# Altium PCB single Joystick and motor PCB.PcbDoc
Units mm, origin at the board's own origin, x right, y up, seen from the top; angles counter-clockwise.
Board outline 152.4 x 101.6 mm, 2 copper layers (Top Layer, Bottom Layer); 15 components, 31 nets, 69 pads, 4 vias.
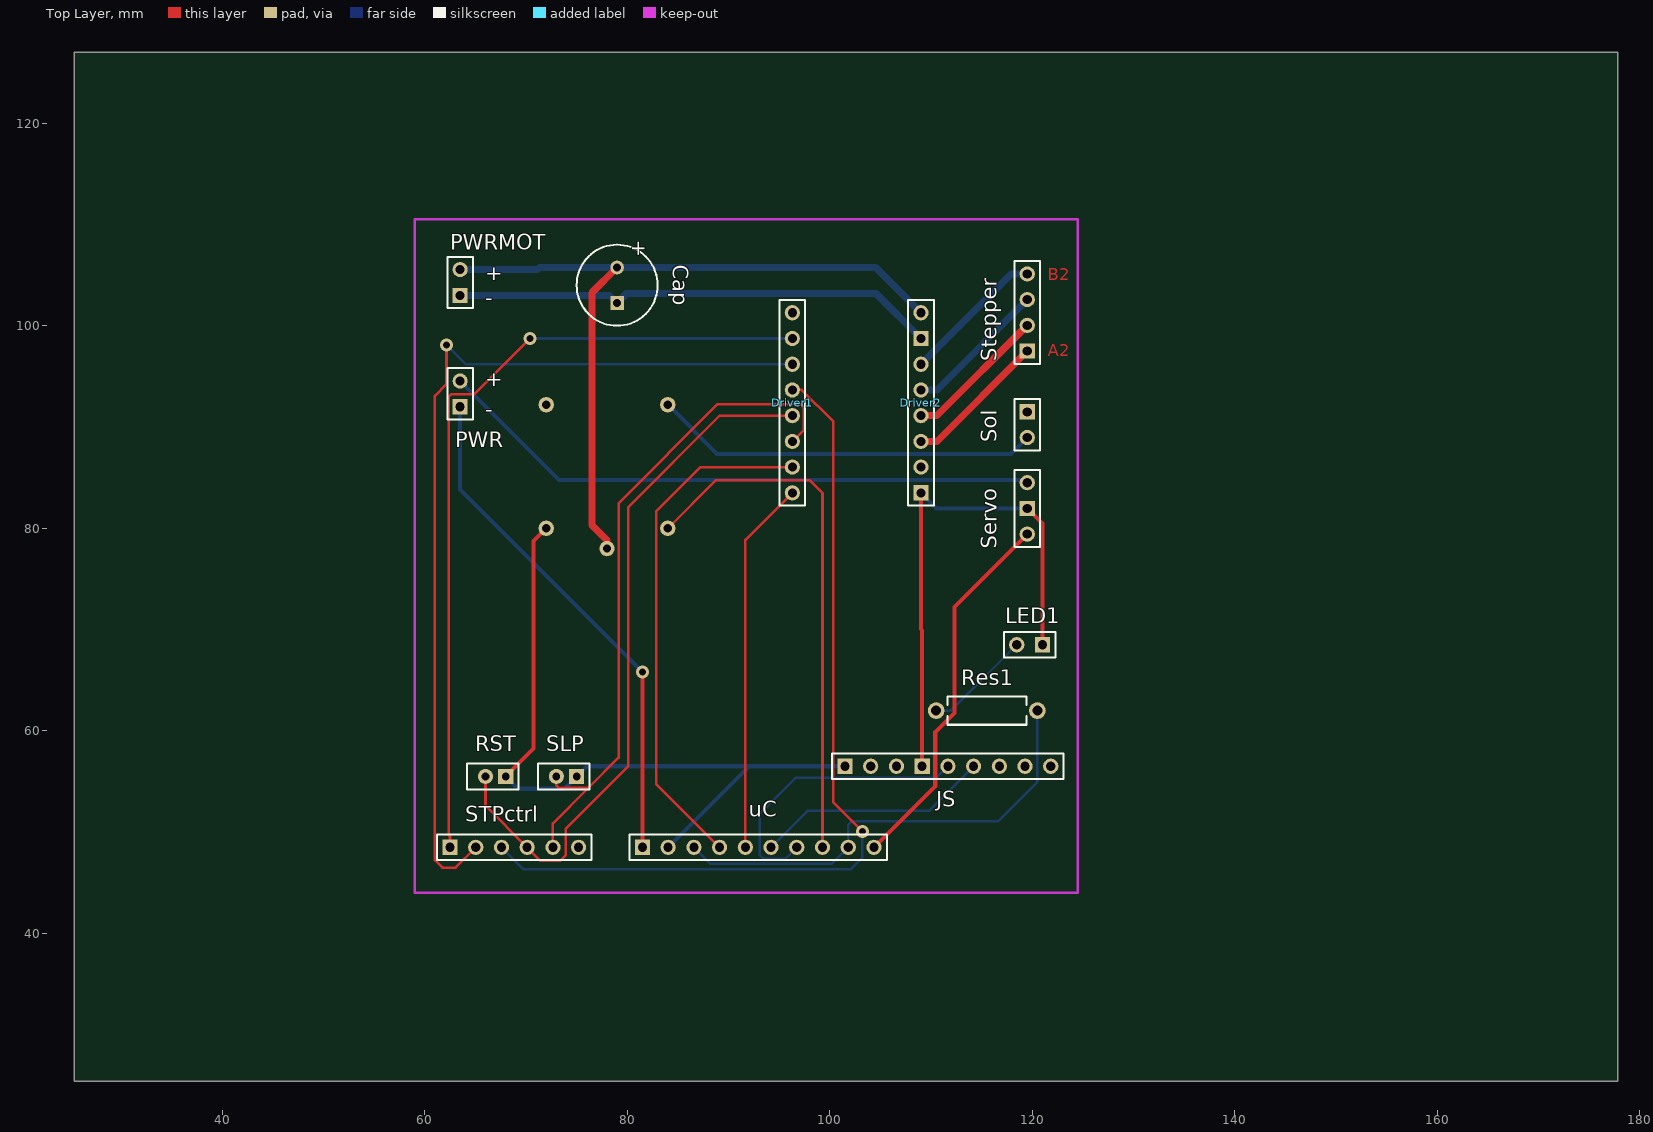
[diagram p0: Top Layer view]
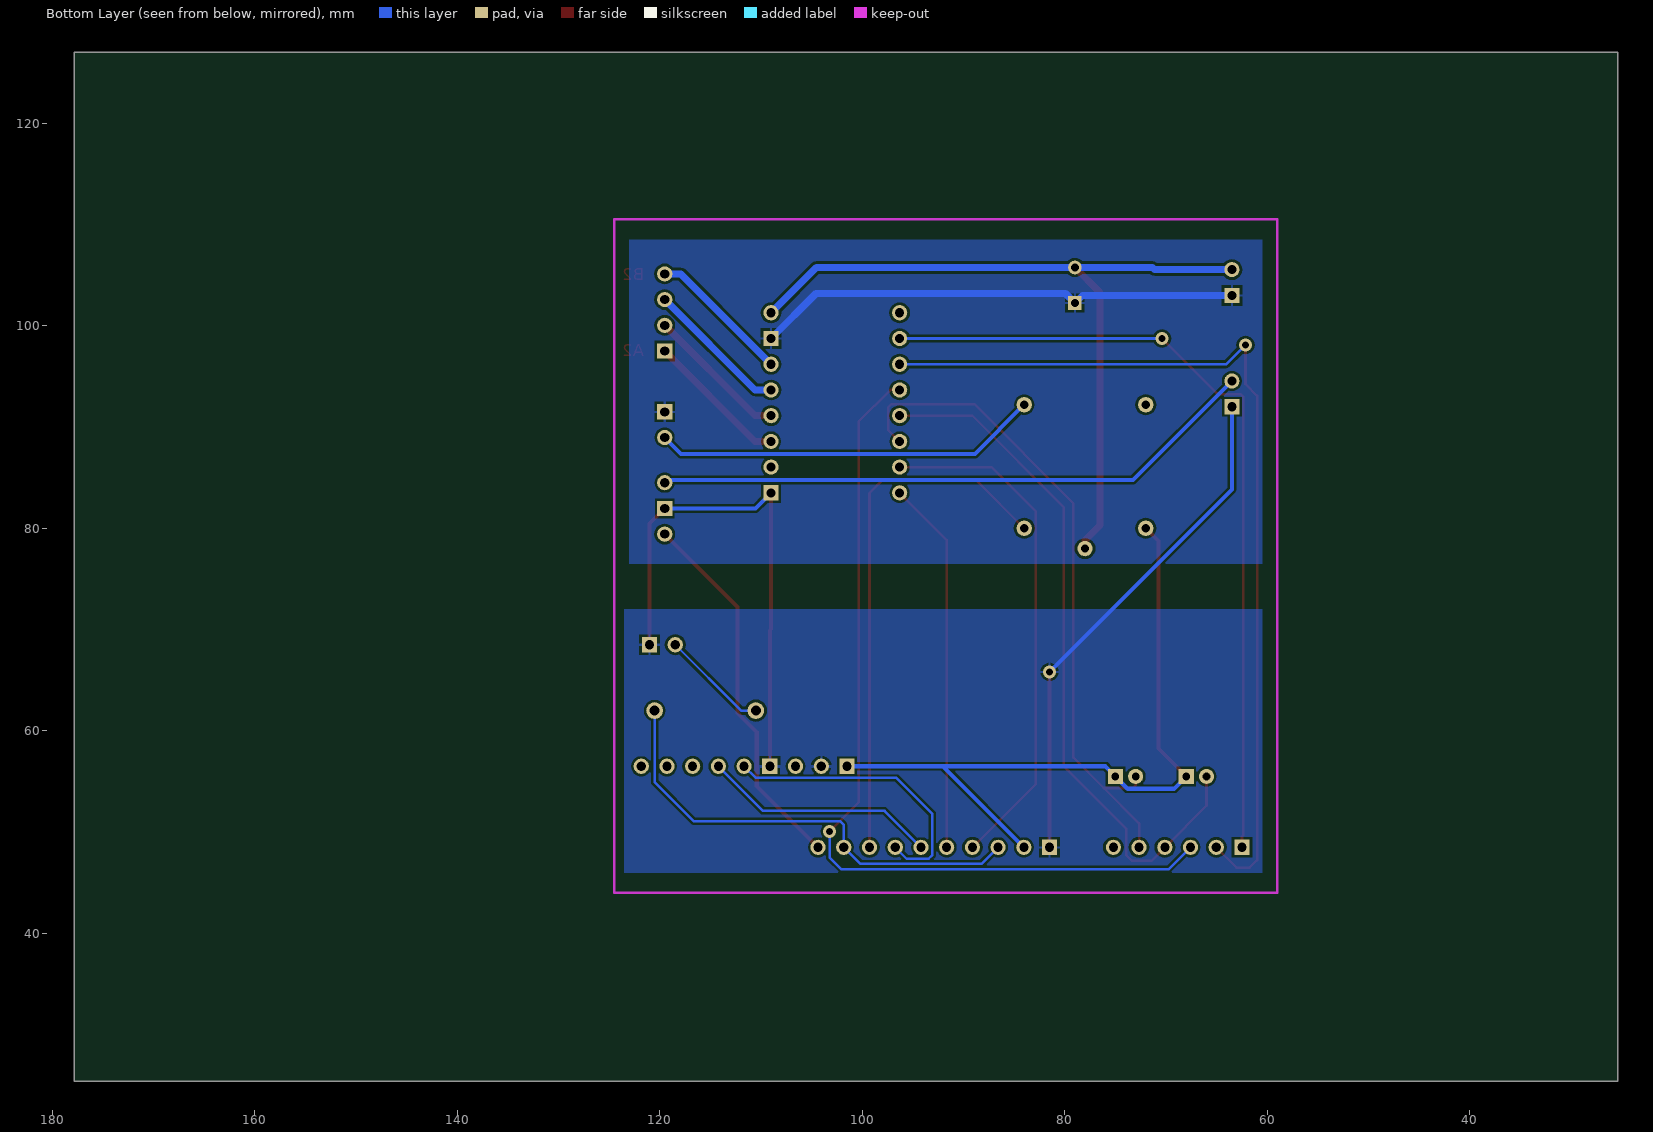
[diagram p1: Bottom Layer view, seen from below]

## Layer stack, top to bottom
Top Solder: solder mask 0.0102, Solder Resist, Dk 3.5
Top Layer: signal copper 0.0356
Dielectric 1: dielectric 0.32, FR-4, Dk 4.8
Bottom Layer: signal copper 0.0356
Bottom Solder: solder mask 0.0102, Solder Resist, Dk 3.5

## Board outline
25.4,25.4 177.8,25.4 177.8,127 25.4,127

## Design rules (kind name [scope] priority, off if disabled: settings)
Clearance [All] p1: gap=0.254 ignorepadtopadclearanceinfootprint=FALSE except(0: Arc-Hole Track-Hole SMDPad-Hole THPad-Hole Via-Hole Fill-Hole Poly-Hole Region-Hole Text-Hole)
PolygonConnect [All] p1: connectstyle=Relief reliefconductorwidth=0.254 reliefentries=4 polygonreliefangle="90 Angle" airgapwidth=0.254
RoutingVias [All] p1: holewidth=0.711 width=1.27 viastyle="Through Hole" minholewidth=0.711 minwidth=1.27 maxholewidth=0.711 maxwidth=1.27
SolderMaskExpansion [All] p1: expansion=0.102 istentingtop=FALSE
Width Width_2 [InNetClass('Motor Power')] p1: maxlimit=1 minlimit=0.5 preferedwidth=0.7
Width Width_1 [InNetClass('Signal')] p2: maxlimit=0.254 minlimit=0.254 preferedwidth=0.254
Width [InNetClass('Power')] p3: maxlimit=0.8 minlimit=0.4 preferedwidth=0.4
30 further rules are at their usual default settings.

## Classes and differential pairs
net class Signal: A2 A3 ADR ALRT DIR EN FLT led1 ledMicro1 M0 M1 M2 PBn relMicro RST SCL SDA SLP solMicro1 STEP
net class Power: Gnd SERVO VCC VM5V Vrel
net class "Motor Power": A1MOT A2MOT B1MOT B2MOT GndMot VMOT12

## Components (designator, comment, footprint, x,y, rotation, side; value= is the part's Value field where it differs from the comment)
Cap "Comment" CAPPR3.5-8x5 79,104 r270 top
Driver1 "Comment" HDR1X8#1 96.3,83.5 r90 top
Driver2 "Comment" HDR1X8#2 109,83.5 r90 top
JS "Comment" HDR1X9 101.5,56.5 r0 top
LED1 "Comment" HDR1X2#1 121,68.5 r180 top
PWR "Comment" HDR1X2#1 63.5,92 r90 top
PWRMOT "Comment" HDR1X2#1 63.5,103 r90 top
Res1 "Comment" RES10-7.8X2.8 115.5,62 r180 top
RST "Comment" HDR1X2#2 68,55.5 r180 top
Servo "Comment" HDR1X3 119.5,84.5 r270 top
SLP "Comment" HDR1X2#2 75,55.5 r180 top
Sol "Comment" HDR1X2#1 119.5,91.5 r270 top
Stepper "Comment" HDR1X4 119.5,97.5 r90 top
STPctrl "Comment" HDR1X6 62.5,48.5 r0 top
uC "Comment" HDR1X10 81.5,48.5 r0 top

## Footprints (in the part's own frame and the unit in brackets; to place one, negate y for a bottom-side part, rotate by r counter-clockwise, add the part's x,y. Pads: shape width x height; smd on the part's side, far side on the other; paste and mask are expansions set on the pad)
CAPPR3.5-8x5 [mm] "Capacitor, Electrolytic, Radial; Body 8 x 5 mm (Dia.xH typ); Pin Spacing 3.5 mm (typ)"
  round 1.35 hole 0.8: 1(-1.75,0)
  rect 1.35x1.35 hole 0.8: 2(1.75,0)
  silkscreen extent -4,-4 4,4
HDR1X2#1 [mm]
  rect 1.5x1.5 hole 0.9: 1(0,0)
  round 1.5 hole 0.9: 2(2.54,0)
  silkscreen extent -1.27,-1.27 3.81,1.27
HDR1X2#2 [mm]
  rect 1.5x1.5 hole 0.762: 1(0,0)
  round 1.5 hole 0.762: 2(2,0)
  silkscreen extent -1.27,-1.27 3.81,1.27
HDR1X3 [mm]
  round 1.5 hole 0.9: 1(0,0) 3(5.08,0)
  rect 1.5x1.5 hole 0.9: 2(2.54,0)
  silkscreen extent -1.27,-1.27 6.35,1.27
HDR1X4 [mm]
  rect 1.5x1.5 hole 0.9: 1(0,0)
  round 1.5 hole 0.9: 2(2.54,0) 3(5.08,0) 4(7.62,0)
  silkscreen extent -1.27,-1.27 8.89,1.27
HDR1X6 [mm]
  rect 1.5x1.5 hole 0.9: 1(0,0)
  round 1.5 hole 0.9: 2(2.54,0) 3(5.08,0) 4(7.62,0) 5(10.16,0) 6(12.7,0)
  silkscreen extent -1.27,-1.27 13.97,1.27
HDR1X8#1 [mm]
  round 1.5 hole 0.9: 1(0,0) 2(2.54,0) 3(5.08,0) 4(7.62,0) 5(10.16,0) 6(12.7,0) 7(15.24,0) 8(17.78,0)
  silkscreen extent -1.27,-1.27 19.05,1.27
HDR1X8#2 [mm]
  rect 1.5x1.5 hole 0.9: 1(0,0) 7(15.24,0)
  round 1.5 hole 0.9: 2(2.54,0) 3(5.08,0) 4(7.62,0) 5(10.16,0) 6(12.7,0) 8(17.78,0)
  silkscreen extent -1.27,-1.27 19.05,1.27
HDR1X9 [mm]
  rect 1.5x1.5 hole 0.9: 1(0,0) 4(7.62,0)
  round 1.5 hole 0.9: 2(2.54,0) 3(5.08,0) 5(10.16,0) 6(12.7,0) 7(15.24,0) 8(17.78,0) 9(20.32,0)
  silkscreen extent -1.27,-1.27 21.59,1.27
HDR1X10 [mm]
  rect 1.5x1.5 hole 0.9: 1(0,0)
  round 1.5 hole 0.9: 2(2.54,0) 3(5.08,0) 4(7.62,0) 5(10.16,0) 6(12.7,0) 7(15.24,0) 8(17.78,0) 9(20.32,0) 10(22.86,0)
  silkscreen extent -1.27,-1.27 24.13,1.27
RES10-7.8X2.8 [mm] "Resistor, Axial; Body 7.8 x 2.8 mm (LxDia. max), Lead Dia. 0.7 mm (max)"
  round 1.65 hole 1: 1(-5,0) 2(5,0)
  silkscreen extent -3.9,-1.4 3.9,1.4

## Free pads (board coordinates)
  round 1.524 hole 0.8: 36(72,80) 36(72,92.2) 37(84,80) 37(84,92.2) 38(78,78)

## Via types
v1: diameter 1.27, hole 0.711, Top Layer to Bottom Layer, 4 vias

## Nets (pads, with @x,y where several pads share a name; then routed paths per layer and width w, separated by ;. In a path a pad name is that pad's centre, name@x,y a point inside that pad or via, vN(x,y) a via of type N, cw(c..) or ccw(c..) an arc to the next point about the centre after c; other vN are vias at no path point)
A1MOT: Driver2.4 Stepper.2 | length 14.2
  Top Layer w0.7: Driver2.4 110.58,91.12 Stepper.2
A2: JS.8
A2MOT: Driver2.3 Stepper.1 | length 14.2
  Top Layer w0.7: Driver2.3 110.58,88.58 Stepper.1
A3: JS.7
ADR: 
ALRT: JS.3
B1MOT: Driver2.5 Stepper.3 | length 14.2
  Bottom Layer w0.7: Driver2.5 110.58,93.66 Stepper.3
B2MOT: Driver2.6 Stepper.4 | length 14.2
  Bottom Layer w0.7: Driver2.6 117.92,105.12 Stepper.4
DIR: Driver1.1 uC.5 | length 36.9
  Top Layer w0.254: uC.5 91.66,78.86 Driver1.1
EN: Driver1.8
FLT: Driver2.2
Gnd: Driver2.1 JS.2 JS.4 LED1.1 PWR.1 Servo.2 uC.1 | length 103.2
  Top Layer w0.4: uC.1 v1(81.5,65.82) ; Driver2.1 109,70.046 109.12,69.926 JS.4 ; Servo.2 121,80.46 LED1.1
  Bottom Layer w0.4: PWR.1 63.5,83.82 v1(81.5,65.82) ; Driver2.1 110.54,81.96 Servo.2
GndMot: Cap.2 Driver2.7 PWRMOT.1 Sol.1 | length 48.1
  Bottom Layer w0.7: PWRMOT.1 78.25,103 Cap.2 79.95,103.2 104.54,103.2 Driver2.7
led1: LED1.2 Res1.2 | length 10.7
  Bottom Layer w0.254: Res1.2 111.96,62 LED1.2
ledMicro1: Res1.1 uC.3 uC.9 | length 46.3
  Bottom Layer w0.254: uC.3 88.219,46.861 100.181,46.861 uC.9 101.82,50.69 102.21,51.079 116.637,51.079 120.5,54.943 Res1.1
M0: Driver1.7 STPctrl.1 | length 80.9
  Top Layer w0.254: STPctrl.1 62.5,49.565 62.357,49.708 62.357,92.964 62.636,93.243 64.897,93.243 v1(70.394,98.74)
  Bottom Layer w0.254: v1(70.394,98.74) Driver1.7
M1: Driver1.6 STPctrl.2 | length 91.4
  Top Layer w0.254: v1(62.154,98.095) 62.154,94.234 61,93.08 61,47.244 61.744,46.5 63.04,46.5 STPctrl.2
  Bottom Layer w0.254: v1(62.154,98.095) 64.049,96.2 Driver1.6
M2: Driver1.5 STPctrl.3 | length 86.6
  Top Layer w0.254: Driver1.5 97.224,93.66 100.355,90.529 100.355,52.934 v1(103.226,50.063)
  Bottom Layer w0.254: STPctrl.3 69.727,46.353 102.081,46.353 103.226,47.498 v1(103.226,50.063)
PBn: JS.9
relMicro: pad.37@84,80 uC.8 | length 52.8
  Top Layer w0.254: pad.37@84,80 88.76,84.76 97.993,84.76 99.28,83.473 uC.8
RST: Driver1.4 RST.2 STPctrl.4 | length 70.1
  Top Layer w0.254: RST.2 66,52.62 STPctrl.4 71.452,47.168 73.355,47.168 73.939,47.752 73.939,50.343 80.086,56.49 80.086,82.074 89.132,91.12 Driver1.4
SCL: JS.6 uC.6 | length 23.3
  Bottom Layer w0.254: uC.6 97.795,52.095 109.795,52.095 JS.6
SDA: JS.5 uC.7 | length 28.9
  Bottom Layer w0.254: uC.7 95.609,47.369 93.452,47.369 93.069,47.752 93.069,51.791 96.625,55.347 110.507,55.347 JS.5
SERVO: Servo.3 uC.10 | length 37.2
  Top Layer w0.4: uC.10 110.414,54.554 110.414,59.868 112.293,61.747 112.293,72.213 Servo.3
SLP: Driver1.3 SLP.2 STPctrl.5 | length 67.1
  Top Layer w0.254: STPctrl.5 72.66,50.867 76.149,54.356 ; SLP.2 73,54.61 73.254,54.356 76.149,54.356 ; Driver1.3 97.434,89.714 97.434,91.948 97.13,92.253 88.931,92.253 79.146,82.469 79.146,57.353 76.149,54.356
solMicro1: 
STEP: Driver1.2 uC.4 | length 51
  Top Layer w0.254: uC.4 82.855,54.765 82.855,81.661 87.234,86.04 Driver1.2
VCC: JS.1 pad.36@72,80 RST.1 SLP.1 uC.2 | length 72.4
  Top Layer w0.4: RST.1 70.739,58.239 70.739,78.739 pad.36@72,80
  Bottom Layer w0.4: RST.1 69.22,54.28 73.78,54.28 SLP.1 76,56.5 92.04,56.5 ; uC.2 92.04,56.5 ; JS.1 92.04,56.5
VM5V: PWR.2 Servo.1 | length 60.2
  Bottom Layer w0.4: PWR.2 73.28,84.76 119.24,84.76 Servo.1
VMOT12: Cap.1 Driver2.8 pad.38 PWRMOT.2 | length 76.8
  Top Layer w0.7: pad.38 78,78.816 76.5,80.316 76.5,103.25 Cap.1
  Bottom Layer w0.7: PWRMOT.2 71.12,105.54 71.33,105.75 Cap.1 104.53,105.75 Driver2.8
Vrel: pad.37@84,92.2 Sol.2 | length 38.2
  Bottom Layer w0.4: pad.37@84,92.2 88.849,87.351 117.891,87.351 Sol.2
pads on no net: STPctrl.6

## Polygon pours and split planes (outlines as drawn)
GndMot on Bottom Layer "GNDMOT_L02_P006" (solid, remove dead copper, pour order 6): 60.5,108.5 60.5,76.5 123,76.5 123,108.5 60.5,108.5
Gnd on Bottom Layer "GND_L02_P002" (solid, remove dead copper, pour order 2): 123.5,46 123.5,72 60.5,72 60.5,46

## Keep-outs
Keep-Out Layer:
  lines w0.254: 59,44 59,110.5 124.5,110.5 124.5,44 59,44

## Other copper
Top Layer:
  text "B2" at 121.5,104.5 h1.2
  text "A2" at 121.5,97 h1.2

## Silkscreen, mask and mechanical layers (free items; w line width, h text height)
Top Overlay:
  text "+" at 66,104.5 h1.52
  text "-" at 66,102 h1.52
  text "+" at 66,94 h1.52
  text "-" at 66,91 h1.52

## Text inside footprints (layer, text, board x,y; h text height)
Cap: Top Overlay "+" at 80.5,108.5 h1.5 r270